# EAGLE board PCB (EAGLE 9.7.0)
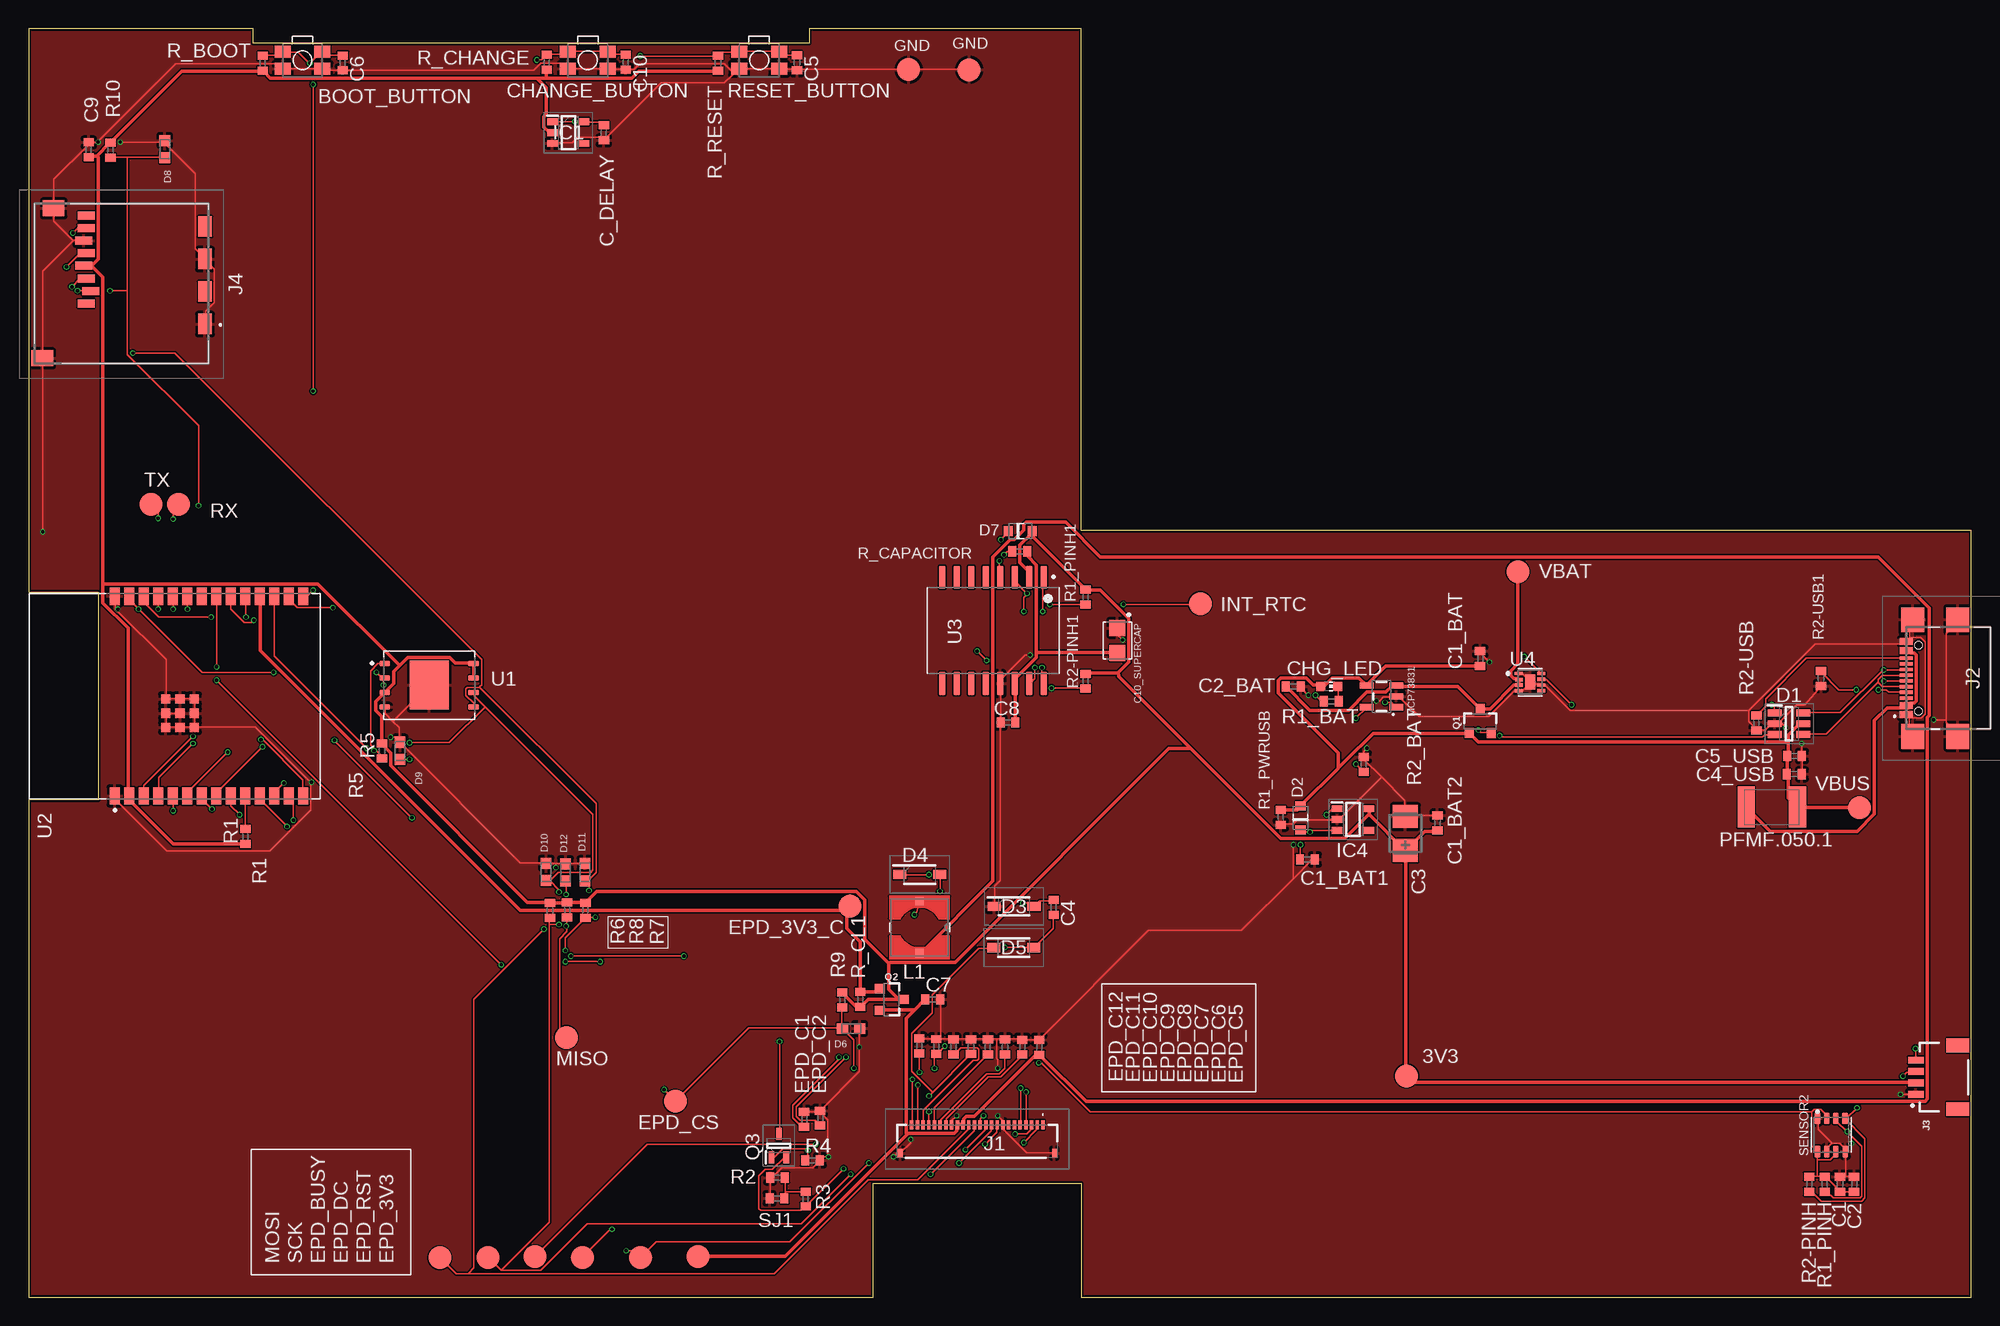
[diagram p0: board, top side]
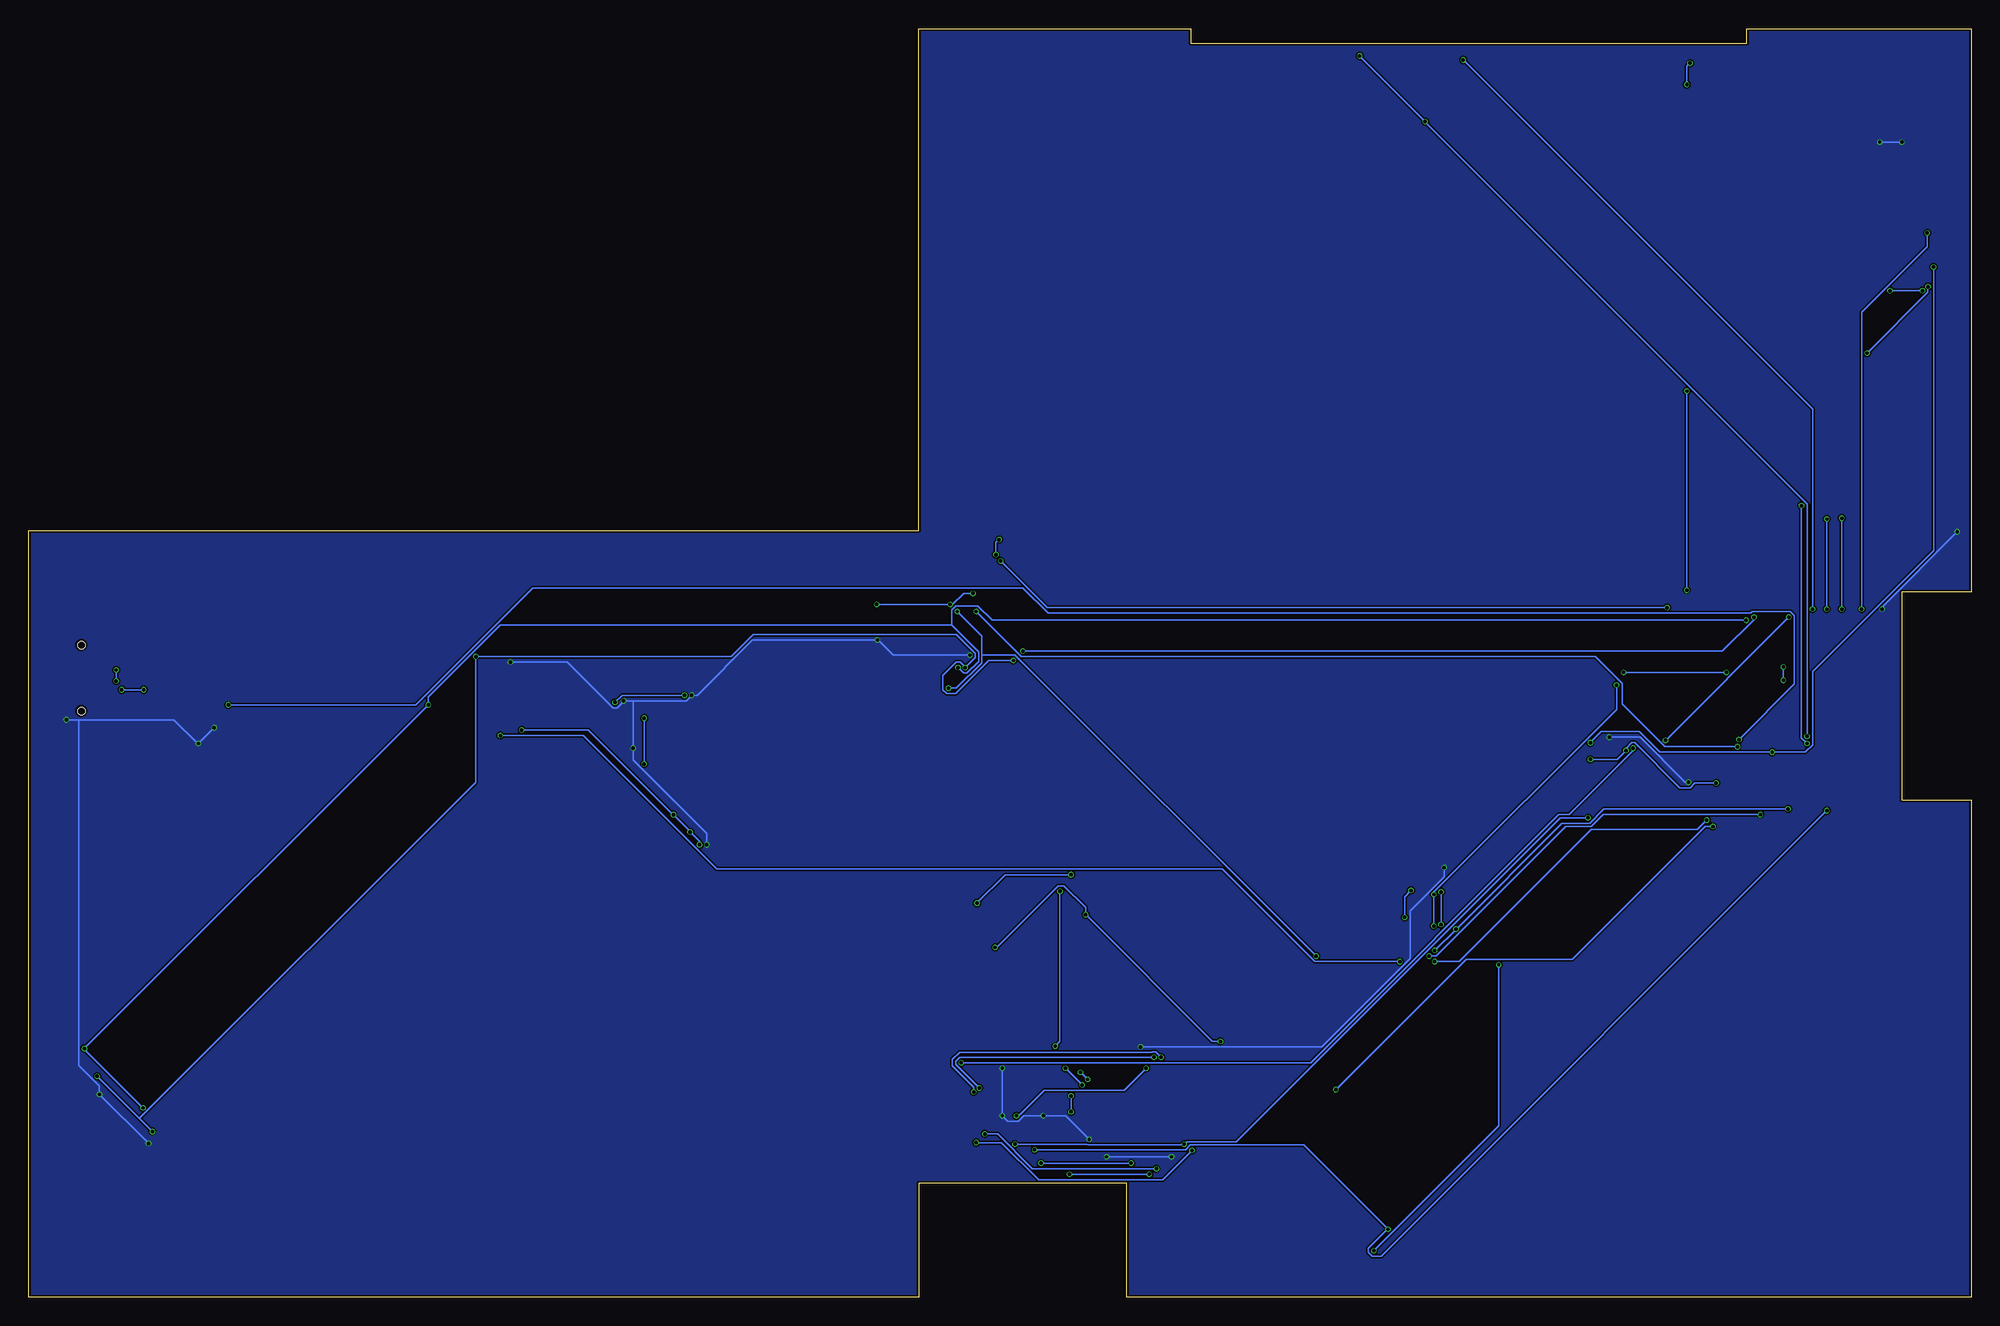
[diagram p1: board, bottom side, seen from below]

Size 170.2 x 111.2 mm. Coordinates in mm from the lower left corner, seen from the top.
Outline: 0,0 74,0 74,10 92.2,10 92.2,0 170.2,0 170.2,67.2 92.2,67.2 92.2,111.2 68.4,111.2 68.4,109.9 19.7,109.9 19.7,111.2 0,111.2 0,61.8 6.1,61.8 6.1,43.6 0,43.6 0,0
Copper layers (1*16): Top 0.035mm / dielectric 1.6mm / Bottom 0.035mm
Design rules "jlcpcb-2layers.dru": minimum track width 5mil, minimum drill 0.3mm, track to track 5mil, track to pad 5mil, pad to pad 5mil, via to via 5mil, smd to smd 5mil, copper to edge 0.2mm, drill to drill 6mil, minimum pad ring 10mil, minimum via ring 3mil, stop-mask expansion 4mil, vias tented up to drill 0mil, thermal gap 10mil
Net classes: 0 default: width 0.15 mm; 1 POWER: width 0.3 mm

## Footprints (pad centres in the part's own frame; a part is rotated, then mirrored left to right if it is on the bottom)
MYBUTTON = smd 1.4 x 1.05: 1 1.75,0.75; 2 -1.75,0.75; 3 -1.75,-0.75; 4 1.75,-0.75
EAGLE-LTSPICE_C0402 = smd 0.7 x 0.9: 1 -0.65,0; 2 0.65,0
RCL_CT3528 = smd 2 x 2.2: + -1.5,0; - 1.5,0
CAPCP3225X100N = smd 1.4 x 1.4: 1 -1.1,0; 2 1.1,0
ADAFRUIT_CHIP-LED0603 = smd 0.8 x 0.8: A 0,-0.75; C 0,0.75
SOT95P280X145-6N = smd 1.2 x 0.6: 1 -1.25,0.95; 2 -1.25,0; 3 -1.25,-0.95; 4 1.25,-0.95; 5 1.25,0; 6 1.25,0.95
ESP32_WROVER_AVX---SD0805S020S1R0_AVX_SD0805S020S1R0_0 = smd 0.8 x 0.9: 1 -1.05,0; 2 1.05,0
SOD3716X135N = smd 1.15 x 0.8: 1 -1.75,0; 2 1.75,0
DIOC1608X36N = smd 0.97 x 0.94: 1 -0.75,0; 2 0.75,0
SOT95P280X125-5N = smd 0.9 x 0.6: 1 -1.4,0.95; 2 -1.4,0; 3 -1.4,-0.95; 4 1.4,-0.95; 5 1.4,0.95
SOT95P280X120-5N = smd 0.9 x 0.6: 1 -1.4,0.95; 2 -1.4,0; 3 -1.4,-0.95; 4 1.4,-0.95; 5 1.4,0.95
FH34SRJ24S05SH99 = smd 0.3 x 0.8: 1 5.75,1.45; 2 5.25,1.45; 3 4.75,1.45; 4 4.25,1.45; 5 3.75,1.45; 6 3.25,1.45; 7 2.75,1.45; 8 2.25,1.45; 9 1.75,1.45; 10 1.25,1.45; 11 0.75,1.45; 12 0.25,1.45; 13 -0.25,1.45; 14 -0.75,1.45; 15 -1.25,1.45; 16 -1.75,1.45; 17 -2.25,1.45; 18 -2.75,1.45; 19 -3.25,1.45; 20 -3.75,1.45; 21 -4.25,1.45; 22 -4.75,1.45; 23 -5.25,1.45; 24 -5.75,1.45 | smd 0.4 x 0.8: MP1 6.75,-1.05; MP2 -6.75,-1.05
SAMACSYS_PARTS_USB4110GFA = smd 0.3 x 1.15: A1 -3.35,3.678; A4 -2.55,3.678; A5 -1.25,3.678; A6 -0.25,3.678; A7 0.25,3.678; A8 1.25,3.678; A9 2.55,3.678; A12 3.35,3.678; B1 3.05,3.678; B4 2.25,3.678; B5 1.75,3.678; B6 0.75,3.678; B7 -0.75,3.678; B8 -1.75,3.678; B9 -2.25,3.678; B12 -3.05,3.678 | smd 2.18 x 2: MP1 -5.11,-0.827; MP2 5.11,-0.827; MP3 -5.11,3.103; MP4 5.11,3.103 | hole 0.65: -2.89,2.603; 2.89,2.603
JST04_1MM_RA = smd 0.6 x 1.35: 1 -1.5,0; 2 -0.5,0; 3 0.5,0; 4 1.5,0 | smd 1.2 x 2: NC1 2.8,-3.675; NC2 -2.8,-3.675
112ATAARR03ATTEND = smd 1.8 x 1.2: G1 10.6,10.4; G2 4.9,10.4; S1 7.75,10.4; S2 2.05,10.4 | smd 1.4 x 1.9: G3 13.6,-3.85; G4 0.45,-2.85 | smd 0.7 x 1.5: P1 8.8,0; P2 7.7,0.4; P3 6.6,0; P4 5.5,-0.2; P5 4.4,0; P6 3.3,-0.2; P7 2.2,0; P8 1.1,0
IND_4828-WE-TPC_WRE = smd 0.762 x 0.762: 1 -2.286,0; 2 2.286,0
ESP32_WROVER_SPARKFUN-IC-POWER_SOT23-5 = smd 0.55 x 1.2: 1 -0.95,-1.3; 2 0,-1.3; 3 0.95,-1.3; 4 0.95,1.3; 5 -0.95,1.3
ESP32C6_VARISTOR_CT/CN1812 = smd 1.5 x 3.6: 1 -2.25,0; 2 2.25,0
ESP32_WROVER_SPARKFUN-DISCRETESEMI_SOT23-3 = smd 0.8 x 0.9: 1 -0.95,-1; 2 0.95,-1; 3 0,1.1
SOT65P210X110-3N = smd 1.05 x 0.5: 1 -1.05,0.65; 2 -1.05,-0.65; 3 1.05,0
ESP32_WROVER_EAGLE-LTSPICE_R0402 = smd 0.7 x 0.9: 1 -0.65,0; 2 0.65,0
ESP32_WROVER_BME680_PSON80P300X300X100-8N = smd 1.016 x 0.5: 1 1.458,1.2; 2 1.458,0.4; 3 1.458,-0.4; 4 1.458,-1.2; 5 -1.458,-1.22; 6 -1.458,-0.4; 7 -1.458,0.4; 8 -1.458,1.2
TP20R = smd 2 x 2: TP 0,0
SON127P600X800X80-9N = smd 0.94 x 0.44: 1 -3.895,1.905; 2 -3.895,0.635; 3 -3.895,-0.635; 4 -3.895,-1.905; 5 3.895,-1.905; 6 3.895,-0.635; 7 3.895,0.635; 8 3.895,1.905 | smd 3.4 x 4.3: 9 0,0
XCVR_ESP32-C6-WROOM-1-N8 = smd 1.5 x 0.9: 1 -8.75,5.26; 2 -8.75,3.99; 3 -8.75,2.72; 4 -8.75,1.45; 5 -8.75,0.18; 6 -8.75,-1.09; 7 -8.75,-2.36; 8 -8.75,-3.63; 9 -8.75,-4.9; 10 -8.75,-6.17; 11 -8.75,-7.44; 12 -8.75,-8.71; 13 -8.75,-9.98; 14 -8.75,-11.25; 15 8.75,-11.25; 16 8.75,-9.98; 17 8.75,-8.71; 18 8.75,-7.44; 19 8.75,-6.17; 20 8.75,-4.9; 21 8.75,-3.63; 22 8.75,-2.36; 23 8.75,-1.09; 24 8.75,0.18; 25 8.75,1.45; 26 8.75,2.72; 27 8.75,3.99; 28 8.75,5.26 | smd 0.8 x 0.8: 29_1 -2.755,0.79; 29_2 -1.505,0.79; 29_3 -0.255,0.79; 29_4 -2.755,-0.46; 29_5 -1.505,-0.46; 29_6 -0.255,-0.46; 29_7 -2.755,-1.71; 29_8 -1.505,-1.71; 29_9 -0.255,-1.71
SOIC127P1032X265-16N = smd 2.05 x 0.59: 1 -4.655,4.445; 2 -4.655,3.175; 3 -4.655,1.905; 4 -4.655,0.635; 5 -4.655,-0.635; 6 -4.655,-1.905; 7 -4.655,-3.175; 8 -4.655,-4.445; 9 4.655,-4.445; 10 4.655,-3.175; 11 4.655,-1.905; 12 4.655,-0.635; 13 4.655,0.635; 14 4.655,1.905; 15 4.655,3.175; 16 4.655,4.445
SON50P200X200X80-9N = smd 0.76 x 0.27: 1 -0.985,0.75; 4 -0.985,-0.75; 5 0.985,-0.75; 6 0.985,-0.25; 7 0.985,0.25; 8 0.985,0.75 | smd 0.76 x 0.33: 2 -0.985,0.203 | smd 0.76 x 0.356: 3 -0.985,-0.25 | smd 0.9 x 1.3: 9 0,0

## Placement (x,y rotation side)
BOOT_BUTTON  [MYBUTTON]  24,108.42 180 top
C1  100nF  [EAGLE-LTSPICE_C0402]  158.68,9.93 90 top
C1_BAT  4.7uF  [EAGLE-LTSPICE_C0402]  127.16,55.99 90 top
C1_BAT1  4.7uF  [EAGLE-LTSPICE_C0402]  112.03,38.38 0 top
C1_BAT2  4.7uF  [EAGLE-LTSPICE_C0402]  123.42,41.57 90 top
C2  100nF  [EAGLE-LTSPICE_C0402]  159.92,9.93 90 top
C2_BAT  4.7uF  [EAGLE-LTSPICE_C0402]  110.8,53.54 0 top
C3  100uF TANT  [RCL_CT3528]  120.61,40.66 90 top
C4  4.7uF/25V  [EAGLE-LTSPICE_C0402]  89.8,34.18 270 top
C4_USB  100nF  [EAGLE-LTSPICE_C0402]  154.69,45.86 0 top
C5  1uF  [EAGLE-LTSPICE_C0402]  67.32,108.21 270 top
C5_USB  4.7uF  [EAGLE-LTSPICE_C0402]  154.7,47.46 0 top
C6  100nF  [EAGLE-LTSPICE_C0402]  27.52,108.18 270 top
C7  10uF  [EAGLE-LTSPICE_C0402]  79.21,26.12 0 top
C8  100nF  [EAGLE-LTSPICE_C0402]  85.8,50.38 180 top
C9  100nF  [EAGLE-LTSPICE_C0402]  5.28,100.58 90 top
C10  100nF  [EAGLE-LTSPICE_C0402]  52.32,108.24 270 top
C10_SUPERCAP  CPH3225A  [CAPCP3225X100N]  95.38,57.57 270 top
C_DELAY  100nF  [EAGLE-LTSPICE_C0402]  50.4,102.06 270 top
CHANGE_BUTTON  [MYBUTTON]  49,108.42 180 top
CHG_LED  [ADAFRUIT_CHIP-LED0603]  113.95,53.55 270 top
D1  USBLC6-2SC6Y  [SOT95P280X145-6N]  154.22,50.28 0 top
D2  SD0805S020S1R0  [ESP32_WROVER_AVX---SD0805S020S1R0_AVX_SD0805S020S1R0_0]  111.43,42.01 90 top
D3  MBR0530  [SOD3716X135N]  86.33,34.26 0 top
D4  MBR0530  [SOD3716X135N]  78.07,37.06 0 top
D5  MBR0530  [SOD3716X135N]  86.31,30.66 0 top
D6  PGB1010603MR  [DIOC1608X36N]  72.05,23.56 0 top
D7  SD0805S020S1R0  [ESP32_WROVER_AVX---SD0805S020S1R0_AVX_SD0805S020S1R0_0]  86.86,67.17 0 top
D8  PGB1010603MR  [DIOC1608X36N]  11.94,100.63 90 top
D9  PGB1010603MR  [DIOC1608X36N]  32.54,47.91 90 top
D10  PGB1010603MR  [DIOC1608X36N]  45.34,37.29 90 top
D11  PGB1010603MR  [DIOC1608X36N]  48.74,37.27 90 top
D12  PGB1010603MR  [DIOC1608X36N]  47.04,37.25 90 top
EPD_C1  1uF/50V  [EAGLE-LTSPICE_C0402]  67.94,15.61 90 top
EPD_C2  1uF/50V  [EAGLE-LTSPICE_C0402]  69.34,15.72 90 top
EPD_C5  0.1uF/50V  [EAGLE-LTSPICE_C0402]  88.54,21.93 90 top
EPD_C6  1uF/50V  [EAGLE-LTSPICE_C0402]  87.04,21.94 90 top
EPD_C7  1uF/50V  [EAGLE-LTSPICE_C0402]  85.54,21.95 90 top
EPD_C8  1uF/50V  [EAGLE-LTSPICE_C0402]  84.04,21.96 90 top
EPD_C9  1uF/50V  [EAGLE-LTSPICE_C0402]  82.56,21.98 90 top
EPD_C10  1uF/50V  [EAGLE-LTSPICE_C0402]  81.03,21.96 90 top
EPD_C11  1uF/50V  [EAGLE-LTSPICE_C0402]  79.52,21.99 90 top
EPD_C12  1uF/50V  [EAGLE-LTSPICE_C0402]  78.02,22.05 90 top
IC1  BD5229G-TR  [SOT95P280X125-5N]  47.29,102.08 0 top
IC4  XC6220A331MR-G  [SOT95P280X120-5N]  116.03,41.88 0 top
J1  FH34SRJ-24S-0.5SH_99_  [FH34SRJ24S05SH99]  83.11,13.68 0 top
J2  [SAMACSYS_PARTS_USB4110GFA]  168.17,54.28 90 top
J3  QWIIC_RIGHT_ANGLE  [JST04_1MM_RA]  165.32,19.3 90 top
J4  112A-TAAR-R03_ATTEND  [112ATAARR03ATTEND]  5.05,95.9 270 top
L1  68uH  [IND_4828-WE-TPC_WRE]  78.05,32.43 270 top
MCP73831  [ESP32_WROVER_SPARKFUN-IC-POWER_SOT23-5]  118.52,52.67 90 top
PFMF.050.1  [ESP32C6_VARISTOR_CT/CN1812]  152.71,42.98 0 top
Q1  20V/4.2A/52mΩ/1.4W  [ESP32_WROVER_SPARKFUN-DISCRETESEMI_SOT23-3]  127.17,50.46 0 top
Q2  20V/4.2A/52mΩ/1.4W  [ESP32_WROVER_SPARKFUN-DISCRETESEMI_SOT23-3]  75.56,26.11 270 top
Q3  SI1308EDL-T1-GE3  [SOT65P210X110-3N]  65.73,13.31 90 top
R1  10k  [ESP32_WROVER_EAGLE-LTSPICE_R0402]  19,40.39 90 top
R1_BAT  200  [ESP32_WROVER_EAGLE-LTSPICE_R0402]  114.11,52.24 0 top
R1_PINH  10K  [ESP32_WROVER_EAGLE-LTSPICE_R0402]  157.35,9.93 90 top
R1_PINH1  10K  [ESP32_WROVER_EAGLE-LTSPICE_R0402]  92.6,61.38 90 top
R1_PWRUSB  100K  [ESP32_WROVER_EAGLE-LTSPICE_R0402]  109.7,42.07 90 top
R2  2.2  [ESP32_WROVER_EAGLE-LTSPICE_R0402]  65.61,10.5 0 top
R2-PINH  10K  [ESP32_WROVER_EAGLE-LTSPICE_R0402]  155.99,9.93 90 top
R2-PINH1  10K  [ESP32_WROVER_EAGLE-LTSPICE_R0402]  92.6,54 90 top
R2-USB  5k1  [ESP32_WROVER_EAGLE-LTSPICE_R0402]  151.36,50.33 90 top
R2-USB1  5k1  [ESP32_WROVER_EAGLE-LTSPICE_R0402]  157.02,54.25 90 top
R2_BAT  2k  [ESP32_WROVER_EAGLE-LTSPICE_R0402]  116.96,46.72 90 top
R3  0.47  [ESP32_WROVER_EAGLE-LTSPICE_R0402]  68.08,8.63 90 top
R4  10K  [ESP32_WROVER_EAGLE-LTSPICE_R0402]  68.67,12.02 0 top
R5  10K  [ESP32_WROVER_EAGLE-LTSPICE_R0402]  30.97,47.89 90 top
R6  10K  [ESP32_WROVER_EAGLE-LTSPICE_R0402]  45.68,33.91 90 top
R7  10K  [ESP32_WROVER_EAGLE-LTSPICE_R0402]  48.78,33.93 90 top
R8  10K  [ESP32_WROVER_EAGLE-LTSPICE_R0402]  47.18,33.95 90 top
R9  10K  [ESP32_WROVER_EAGLE-LTSPICE_R0402]  71.28,26.07 90 top
R10  10K  [ESP32_WROVER_EAGLE-LTSPICE_R0402]  7.18,100.55 90 top
R_BOOT  10K  [ESP32_WROVER_EAGLE-LTSPICE_R0402]  20.52,108.16 90 top
R_CAPACITOR  15  [ESP32_WROVER_EAGLE-LTSPICE_R0402]  86.84,65.38 0 top
R_CHANGE  10K  [ESP32_WROVER_EAGLE-LTSPICE_R0402]  45.4,108.24 90 top
R_CL1  10K  [ESP32_WROVER_EAGLE-LTSPICE_R0402]  72.86,26.11 90 top
R_RESET  10K  [ESP32_WROVER_EAGLE-LTSPICE_R0402]  60.4,108.16 90 top
RESET_BUTTON  [MYBUTTON]  64,108.42 180 top
SENSOR2  BME688  [ESP32_WROVER_BME680_PSON80P300X300X100-8N]  157.92,14.25 90 top
SJ1  [ESP32_WROVER_EAGLE-LTSPICE_R0402]  65.56,8.68 0 top
TP1  TPTP20R  [TP20R]  10.72,69.5 0 top
TP2  TPTP20R  [TP20R]  13.15,69.5 0 top
TP3  TPTP20R  [TP20R]  130.47,63.6 0 top
TP4  TPTP20R  [TP20R]  77.09,107.6 0 top
TP5  TPTP20R  [TP20R]  82.39,107.58 0 top
TP6  TPTP20R  [TP20R]  47.11,22.78 0 top
TP7  TPTP20R  [TP20R]  36.03,3.48 0 top
TP8  TPTP20R  [TP20R]  40.25,3.48 0 top
TP9  TPTP20R  [TP20R]  44.37,3.58 0 top
TP10  TPTP20R  [TP20R]  56.66,17.2 0 top
TP11  TPTP20R  [TP20R]  48.51,3.5 0 top
TP12  TPTP20R  [TP20R]  53.61,3.5 0 top
TP13  TPTP20R  [TP20R]  71.96,34.3 0 top
TP14  TPTP20R  [TP20R]  160.41,42.9 0 top
TP15  TPTP20R  [TP20R]  102.66,60.8 0 top
TP16  TPTP20R  [TP20R]  120.71,19.4 0 top
TP17  TPTP20R  [TP20R]  58.66,3.6 0 top
U1  W25Q512JVEIQ  [SON127P600X800X80-9N]  35.1,53.66 0 top
U2  ESP32-C6-WROOM-1-N8  [XCVR_ESP32-C6-WROOM-1-N8]  12.81,52.7 90 top
U3  DS3231SN#  [SOIC127P1032X265-16N]  84.5,58.45 270 top
U4  MAX17048G+T10  [SON50P200X200X80-9N]  131.54,53.93 0 top

## Library data of the parts
BOOT_BUTTON CHANGE_BUTTON CHG_LED PFMF.050.1 RESET_BUTTON SJ1 TP1-TP17 = DeskAssistant v19 v1
C1 C1_BAT C1_BAT1 C1_BAT2 C2 C2_BAT C4 C4_USB C5 C5_USB C6-C10 C_DELAY EPD_C1 EPD_C2 EPD_C5-EPD_C12 = DeskAssistant v19 v1; SPICEMODEL: NONE; SPICEPREFIX: C
C3 = DeskAssistant v19 v1; SPICEPREFIX: C
C10_SUPERCAP = DeskAssistant v19 v1; AVAILABILITY: Not in stock; CHECK_PRICES: https://www.snapeda.com/parts/CPH3225A/Seiko+Instruments/view-part/?ref=eda; DESCRIPTION: 11 mF (EDLC) Supercapacitor 3.3 V 1210 (3225 Metric) - -; MF: Seiko Instruments; MP: CPH3225A; PACKAGE: 1210 Seiko; PRICE: None; PURCHASE-URL: https://www.snapeda.com/api/url_track_click_mouser/?unipart_id=562593&manufacturer=Seiko Instruments&part_name=CPH3225A&search_term=None; SNAPEDA_LINK: https://www.snapeda.com/parts/CPH3225A/Seiko+Instruments/view-part/?ref=snap
D1 = DeskAssistant v19 v1; AVAILABILITY: In Stock; CHECK_PRICES: https://www.snapeda.com/parts/USBLC6-2SC6Y/STMicroelectronics/view-part/?ref=eda; DESCRIPTION: 17V Clamp 5A (8/20µs) Ipp Tvs Diode Surface Mount SOT-23-6; MF: STMicroelectronics; MP: USBLC6-2SC6Y; PACKAGE: SOT-23-6 STMicroelectronics; PRICE: None; SNAPEDA_LINK: https://www.snapeda.com/parts/USBLC6-2SC6Y/STMicroelectronics/view-part/?ref=snap
D2 D7 = DeskAssistant v19 v1; CENTROID_NOT_SPECIFIED: No; DATASHEET: http://datasheets.avx.com/schottky.pdf; DIGIKEY_DESCRIPTION: DIODE SCHOTTKY 20V 1A 0805; DIGIKEY_PART_NUMBER: 478-7800-1-ND; LEAD_FREE: yes; MF: AVX; MOUSER_PART_NUMBER: 581-SD0805S020S1R0; PACKAGE: 0805 (2012 metric); PREFIX: D; ROHS: yes; TEMPERATURE_RANGE_HIGH: +125°C; TEMPERATURE_RANGE_LOW: -55°C
D3-D5 = DeskAssistant v19 v1; AVAILABILITY: In Stock; CHECK_PRICES: https://www.snapeda.com/parts/MBR0530/Onsemi/view-part/?ref=eda; DESCRIPTION: Diode Schottky 30 V 500mA Surface Mount SOD-123; MF: ON Semiconductor; MP: MBR0530; PACKAGE: SOD-123-2 ON Semiconductor; PRICE: None; PURCHASE-URL: https://www.snapeda.com/api/url_track_click_mouser/?unipart_id=179458&manufacturer=ON Semiconductor&part_name=MBR0530&search_term=None; SNAPEDA_LINK: https://www.snapeda.com/parts/MBR0530/Onsemi/view-part/?ref=snap
D6 D8-D12 = DeskAssistant v19 v1; AVAILABILITY: In Stock; CHECK_PRICES: https://www.snapeda.com/parts/PGB1010603MR/Littelfuse/view-part/?ref=eda; DESCRIPTION: 150V (Typ) Clamp - Ipp Tvs Diode Surface Mount 0603 (1608 Metric); MF: Littelfuse Inc.; MP: PGB1010603MR; PACKAGE: 0603 Littelfuse Inc.; PRICE: None; PURCHASE-URL: https://www.snapeda.com/api/url_track_click_mouser/?unipart_id=5659453&manufacturer=Littelfuse Inc.&part_name=PGB1010603MR&search_term=None; SNAPEDA_LINK: https://www.snapeda.com/parts/PGB1010603MR/Littelfuse/view-part/?ref=snap
IC1 = DeskAssistant v19 v1; DESCRIPTION: Voltage Detector with Adjustable Delay Time: CMOS processes are utilized to develop high precision, low current consumption CMOS reset ICs that allow arbitrary setting of the delay time. The extensive lineup includes both Nch Open Drain and CMOS output types in a wide range of detection voltages (from 2.3V to 6.0V, in 0.1V steps), enabling selection of the ideal solution based on customer requirements. In addition, the entire series is of course both lead-free and RoHS-compliant.; HEIGHT: 1.25mm; MANUFACTURER_NAME: ROHM Semiconductor; MANUFACTURER_PART_NUMBER: BD5229G-TR; MOUSER_PART_NUMBER: 755-BD5229G-TR; MOUSER_PRICE-STOCK: https://www.mouser.co.uk/ProductDetail/ROHM-Semiconductor/BD5229G-TR?qs=4kLU8WoGk0vvnhrrYwdszw%3D%3D
IC4 = DeskAssistant v19 v1; DESCRIPTION: LDO Voltage Regulators; HEIGHT: 1.2mm; MANUFACTURER_NAME: Torex; MANUFACTURER_PART_NUMBER: XC6220A331MR-G; MOUSER_PART_NUMBER: 865-XC6220A331MR-G; MOUSER_PRICE-STOCK: https://www.mouser.co.uk/ProductDetail/Torex-Semiconductor/XC6220A331MR-G?qs=AsjdqWjXhJ8ZSWznL1J0gg%3D%3D
J1 = DeskAssistant v19 v1; DESCRIPTION: 24 Position FFC, FPC Connector Contacts, Top and Bottom 0.020" (0.50mm) Surface Mount, Right Angle; HEIGHT: 1.1mm; MANUFACTURER_NAME: Hirose; MANUFACTURER_PART_NUMBER: FH34SRJ-24S-0.5SH(99); MOUSER_PART_NUMBER: 798-FH34SRJ24S05SH99; MOUSER_PRICE-STOCK: https://www.mouser.co.uk/ProductDetail/Hirose-Connector/FH34SRJ-24S-0.5SH99?qs=vcbW%252B4%252BSTIpKBl5ap9J8Fw%3D%3D
J2 = DeskAssistant v19 v1; DESCRIPTION: CONN USB 2.0 TYPE-C R/A SMT; HEIGHT: 3.26mm; MANUFACTURER_NAME: GCT (GLOBAL CONNECTOR TECHNOLOGY); MANUFACTURER_PART_NUMBER: USB4110-GF-A; MOUSER_PART_NUMBER: 640-USB4110-GF-A; MOUSER_PRICE-STOCK: https://www.mouser.co.uk/ProductDetail/GCT/USB4110-GF-A?qs=KUoIvG%2F9IlYiZvIXQjyJeA%3D%3D
J3 = DeskAssistant v19 v1; PROD_ID: CONN-13694
J4 = DeskAssistant v19 v1; DESCRIPTION: Micro SD Card Socket, Push-Push Type, Top Mount, SMT, H=1.83mm, 10u; HEIGHT: 1.9mm; MANUFACTURER_NAME: ATTEND; MANUFACTURER_PART_NUMBER: 112A-TAAR-R03 ATTEND
L1 = DeskAssistant v19 v1; COPYRIGHT: Copyright (C) 2024 Ultra Librarian. All rights reserved.; MANUFACTURER_PART_NUMBER: 744043680; MFR_NAME: Wurth Electronics
MCP73831 = DeskAssistant v19 v1; PROD_ID: IC-09995
Q1 Q2 = DeskAssistant v19 v1; PROD_ID: TRAN-14388
Q3 = DeskAssistant v19 v1; AVAILABILITY: In Stock; CHECK_PRICES: https://www.snapeda.com/parts/SI1308EDL-T1-GE3/Vishay+Siliconix/view-part/?ref=eda; DESCRIPTION: Si1308EDL-T1-GE3 N-channel MOSFET Transistor, 1.5 A, 30 V, 3-Pin SC-70 | Siliconix / Vishay SI1308EDL-T1-GE3; MF: Vishay Siliconix; MP: SI1308EDL-T1-GE3; PACKAGE: SOT-323 Vishay Semiconductor; PRICE: None; PURCHASE-URL: https://www.snapeda.com/api/url_track_click_mouser/?unipart_id=274603&manufacturer=Vishay Siliconix&part_name=SI1308EDL-T1-GE3&search_term=None; SNAPEDA_LINK: https://www.snapeda.com/parts/SI1308EDL-T1-GE3/Vishay+Siliconix/view-part/?ref=snap
R1 R1_BAT R1_PINH R1_PINH1 R1_PWRUSB R2 R2-PINH R2-PINH1 R2-USB R2-USB1 R2_BAT R3-R10 R_BOOT R_CAPACITOR R_CHANGE R_CL1 R_RESET = DeskAssistant v19 v1; SPICEMODEL: NONE; SPICEPREFIX: R
SENSOR2 = DeskAssistant v19 v1; AVAILABILITY: Unavailable; DESCRIPTION: Integrated Environmental Unit; MF: Bosch Sensortec; MP: BME680; PACKAGE: LGA-8 Bosch Tools; PRICE: None
U1 = DeskAssistant v19 v1; AVAILABILITY: In Stock; CHECK_PRICES: https://www.snapeda.com/parts/W25Q512JVEIQ/Winbond+Electronics/view-part/?ref=eda; DESCRIPTION: FLASH - NOR Memory IC 512Mb (64M x 8) SPI - Quad I/O 133 MHz 8-WSON (8x6); MF: Winbond Electronics; MP: W25Q512JVEIQ; PACKAGE: Package; PRICE: None; SNAPEDA_LINK: https://www.snapeda.com/parts/W25Q512JVEIQ/Winbond+Electronics/view-part/?ref=snap
U2 = DeskAssistant v19 v1; AVAILABILITY: In Stock; CHECK_PRICES: https://www.snapeda.com/parts/ESP32-C6-WROOM-1-N8/Espressif+Systems/view-part/?ref=eda; DESCRIPTION: Multiprotocol Modules ESP32-C6 module, Wi-Fi 6 in 2.4 GHz band, Bluetooth 5, Zigbee 3.0 and Thread. ESP34-WROOM Compatible - ENGINEERING SAMPLE; MF: Espressif Systems; MP: ESP32-C6-WROOM-1-N8; PACKAGE: None; PRICE: None; SNAPEDA_LINK: https://www.snapeda.com/parts/ESP32-C6-WROOM-1-N8/Espressif+Systems/view-part/?ref=snap
U3 = DeskAssistant v19 v1; AVAILABILITY: In Stock; CHECK_PRICES: https://www.snapeda.com/parts/DS3231SN%23/Analog+Devices/view-part/?ref=eda; DESCRIPTION: Extremely Accurate I²C-Integrated RTC/TCXO/Crystal; MF: Analog Devices; MP: DS3231SN#; PACKAGE: SOIC-16 Maxim; PRICE: None; PURCHASE-URL: https://www.snapeda.com/api/url_track_click_mouser/?unipart_id=99048&manufacturer=Analog Devices&part_name=DS3231SN#&search_term=None; SNAPEDA_LINK: https://www.snapeda.com/parts/DS3231SN%23/Analog+Devices/view-part/?ref=snap
U4 = DeskAssistant v19 v1; AVAILABILITY: In Stock; CHECK_PRICES: https://www.snapeda.com/parts/MAX17048G+T10/Analog+Devices/view-part/?ref=eda; DESCRIPTION: 3µA 1-Cell/2-Cell Fuel Gauge with ModelGauge; MF: Analog Devices; MP: MAX17048G+T10; PACKAGE: TDFN-8 Maxim; PRICE: None; PURCHASE-URL: https://www.snapeda.com/api/url_track_click_mouser/?unipart_id=329239&manufacturer=Analog Devices&part_name=MAX17048G+T10&search_term=None; SNAPEDA_LINK: https://www.snapeda.com/parts/MAX17048G+T10/Analog+Devices/view-part/?ref=snap

## Nets
3V3 [POWER]: C1_BAT2.1 C3.+ C9.1 D7.2 IC1.2 IC4.5 J3.2 J4.P4 Q2.3 R1.1 R1_PINH1.2 R2-PINH1.2 R5.2 R6.2 R7.2 R8.2 R9.2 R10.2 R_BOOT.1 R_CHANGE.1 R_CL1.1 R_RESET.1 TP16.TP U1.3 U1.7 U1.8 U2.2 U3.2
32KHZ: R2-PINH1.1 U2.9 U3.1
DN: D1.4 J2.A7 J2.B7
DP: D1.6 J2.A6 J2.B6
EPD_3V3 [POWER]: C7.1 EPD_C5.1 J1.15 J1.16 L1.2 Q2.2 TP17.TP
EPD_3V3_C [POWER]: Q2.1 R_CL1.2 TP13.TP U2.18
EPD_BUSY: J1.9 TP9.TP U2.26
EPD_CS: D6.1 J1.12 R9.1 TP10.TP U2.11
EPD_DC: J1.11 TP11.TP U2.5
EPD_RST: J1.10 TP12.TP U2.21
FLASH_CS: D9.1 R5.1 U1.1 U2.12
GDR: J1.2 Q3.1 R4.1
GND: BOOT_BUTTON.1 BOOT_BUTTON.2 C1.2 C1_BAT1.2 C1_BAT2.2 C1_BAT.2 C2.2 C2_BAT.2 C3.- C4_USB.2 C5.2 C5_USB.2 C6.2 C7.2 C8.2 C9.2 C10.2 C10_SUPERCAP.1 C_DELAY.2 CHANGE_BUTTON.1 CHANGE_BUTTON.2 D1.2 D3.1 D6.2 D8.2 D9.2 D10.2 D11.2 D12.2 EPD_C1.2 EPD_C2.2 EPD_C5.2 EPD_C6.2 EPD_C7.2 EPD_C8.2 EPD_C9.2 EPD_C10.2 EPD_C11.2 EPD_C12.2 IC1.3 IC4.2 J1.8 J1.17 J1.MP1 J1.MP2 J2.A1 J2.A12 J2.B1 J2.B12 J2.MP1 J2.MP2 J2.MP3 J2.MP4 J3.1 J4.G1 J4.G2 J4.G3 J4.G4 J4.P6 MCP73831.2 R1_PWRUSB.1 R2-USB1.1 R2-USB.1 R2.1 R2_BAT.2 R4.2 RESET_BUTTON.1 RESET_BUTTON.2 SENSOR2.1 SENSOR2.5 SENSOR2.7 SJ1.1 TP4.TP TP5.TP U1.4 U1.9 U2.1 U2.28 U2.29_1 U2.29_2 U2.29_3 U2.29_4 U2.29_5 U2.29_6 U2.29_7 U2.29_8 U2.29_9 U3.13 U4.1 U4.4 U4.6 U4.9
GPIO8: R1.2 U2.10
I2C_PW: C1.1 C2.1 R1_PINH.2 R2-PINH.2 SENSOR2.2 SENSOR2.6 SENSOR2.8 U2.17
INT_RTC: R1_PINH1.1 TP15.TP U2.8 U3.3
IO/BOOT: BOOT_BUTTON.3 BOOT_BUTTON.4 C6.1 R_BOOT.2 U2.15
IO/CHANGE: C10.1 CHANGE_BUTTON.3 CHANGE_BUTTON.4 R_CHANGE.2 U2.23
MISO: D12.1 J4.P7 R8.1 TP6.TP U1.2 U2.27
MOSI: D11.1 J1.14 J4.P3 R7.1 TP7.TP U1.5 U2.7
N$1: J2.A5 R2-USB1.2
N$2: J2.B5 R2-USB.2
N$4: EPD_C12.1 J1.24
N$5: C1_BAT1.1 D2.1 IC4.1 IC4.3 Q1.2
N$6: CHG_LED.C R1_BAT.2
N$7: C4.1 D3.2 D4.1
N$8: MCP73831.1 R1_BAT.1
N$9: MCP73831.5 R2_BAT.1
N$10: EPD_C2.1 J1.5
N$11: EPD_C10.1 J1.22
N$12: EPD_C1.1 J1.4
N$13: EPD_C8.1 J1.20
N$14: EPD_C7.1 J1.19
N$15: EPD_C6.1 J1.18
N$16: C_DELAY.1 IC1.5
N$17: D7.1 R_CAPACITOR.1
PREVGH: D5.1 EPD_C9.1 J1.21
PREVGL: D4.2 EPD_C11.1 J1.23
RESE: J1.3 Q3.2 R3.1
RESE': R2.2 R3.2 SJ1.2
RESET: C5.1 IC1.1 R_RESET.2 RESET_BUTTON.3 RESET_BUTTON.4 U2.3
RTC_RST: U2.16 U3.4
RX: TP2.TP U2.24
SCK: D10.1 J1.13 J4.P5 R6.1 TP8.TP U1.6 U2.6
SCL: J3.4 R2-PINH.1 SENSOR2.4 U2.20 U3.16 U4.7
SDA: J3.3 R1_PINH.1 SENSOR2.3 U2.19 U3.15 U4.8
SRC: C4.2 D5.2 L1.1 Q3.3
SS_SD: D8.1 J4.P2 R10.1 U2.4
TX: TP1.TP U2.25
USB_D+: D1.1 U2.14
USB_D-: D1.3 U2.13
VBAT [POWER]: C2_BAT.1 MCP73831.3 Q1.3 TP3.TP U4.2 U4.3
VBUS [POWER]: C1_BAT.1 C4_USB.1 C5_USB.1 CHG_LED.A D1.5 D2.2 MCP73831.4 PFMF.050.1.2 Q1.1 R1_PWRUSB.2 TP14.TP
VRTC [POWER]: C8.1 C10_SUPERCAP.2 R_CAPACITOR.2 U3.14
VUSB [POWER]: J2.A4 J2.A9 J2.B4 J2.B9 PFMF.050.1.1

## Tracks (layer width: path | path; a pad name or v marks a point on that pad's centre or on a via)
3V3
  Top 0.3: U3.2 87.67,63.16 87.67,63.57 86.84,64.4 86.84,65.93 87.88,66.97 87.88,67.1 D7.2 87.88,66.76 92.52,62.12 R1_PINH1.2 92.66,61.98 93.9,61.98 96.4,59.49 96.4,55.68 95.43,54.71 | 95.43,54.71 92.66,54.71 R2-PINH1.2 | 117.45,42.31 117.45,42.8 IC4.5 | 117.45,42.31 120.56,39.2 C3.+ | C1_BAT2.1 123.4,40.86 122.3,40.86 120.7,39.27 C3.+ | J3.2 165.3,18.84 121.33,18.84 120.77,19.39 TP16.TP 120.63,19.53 120.63,39.06 C3.+ | 101.83,48.1 109.69,40.23 115.3,40.23 117.31,42.24 117.45,42.31 | 101.83,48.1 95.5,54.43 95.5,54.57 95.43,54.71 | R9.2 71.33,26.66 72.5,25.48 72.85,25.48 R_CL1.1 72.99,25.55 73.54,26.11 76,26.11 | 76,26.11 Q2.3 | U1.7 38.99,54.36 38.99,55.54 U1.8 38.85,55.61 37.4,55.61 36.91,56.09 33.24,56.09 32.51,55.37 | 32.51,55.37 31.99,54.85 31.99,53.81 31.3,53.12 U1.3 31.16,52.98 30.4,52.22 30.4,51.45 30.95,50.9 30.95,48.54 R5.2 31.02,48.41 31.72,47.71 31.72,46.6 43.7,34.62 45.57,34.62 R6.2 45.7,34.56 47.16,34.56 R8.2 47.3,34.62 48.75,34.62 R7.2 48.89,34.69 49.79,35.59 72.5,35.59 73.27,34.83 73.27,31.37 75.34,29.29 | 75.34,29.29 75.34,27 76,26.34 76,26.11 | 45.36,106.85 45.36,107 45.36,107.55 R_CHANGE.1 | IC1.2 45.84,102.14 45.57,102.14 45.15,102.56 45.15,103.46 45.36,103.67 45.36,106 44.51,106.85 | 45.36,106.85 52.84,106.85 53.46,107.48 60.39,107.48 R_RESET.1 | R1.1 18.97,39.75 12.67,39.75 8.86,43.56 8.86,43.9 U2.2 8.73,44.04 8.73,58.66 6.51,60.87 6.51,62.53 | 5.96,100 5.33,100 C9.1 | 5.96,100 7.13,101.17 R10.2 7.27,101.31 13.43,107.48 20.5,107.48 R_BOOT.1 20.64,107.41 21.19,106.85 44,106.85 44.51,106.85 | 5.54,90.44 4.92,90.44 J4.P4 | 5.54,90.44 6.09,91 6.09,99.93 5.96,100
  Top 0.3: 6.51,62.53 6.51,89.4 5.61,90.3 5.54,90.44 | 44.51,106.85 45.36,106.85 | 32.51,55.37 25.35,62.53 6.51,62.53 | 75.34,29.29 75.48,29.36 81.16,29.36 99.9,48.1 101.83,48.1
32KHZ  (via drill 0.3)
  Top 0.15: v89.61,53.39 92.59,53.39 R2-PINH1.1 | v88.85,60.11 88.85,63.02 88.92,63.09 U3.1 | v18.49,42.31 17.73,43.07 17.73,43.9 U2.9 | v57.41,29.92 v47.51,29.92
  Bottom 0.15: v89.61,53.39 88.92,53.39 86.7,55.61 86.7,56.3 | 86.7,56.3 86.7,57.96 v88.85,60.11 | v18.49,42.31 32.27,42.31 33.31,41.27 35.52,41.27 46.88,29.92 v47.51,29.92 | v57.41,29.92 83.79,56.3 86.7,56.3
DN
  Top 0.15: 162.04,53.88 162.39,53.53 J2.B7 | 162.04,53.88 162.04,54.15 162.39,54.5 164.47,54.5 J2.A7 | D1.4 155.54,49.38 157.47,49.38 161.98,53.88 162.04,53.88 | J2.B7
DP  (via drill 0.3)
  Top 0.15: D1.6 155.54,51.24 158.72,51.24 162.46,54.98 v162.53,54.98 164.45,54.98 J2.B6 | v162.53,54.02 164.48,54.02 J2.A6
  Bottom 0.15: v162.53,54.98 v162.53,54.02
EPD_3V3
  Top 0.3: 77.63,25.21 74.58,25.21 Q2.2 | 77.63,25.21 78.53,26.11 C7.1 | 76.97,14.3 77.08,14.4 81.09,14.4 81.3,14.61 81.3,15.03 J1.16 81.37,15.17 81.85,15.17 J1.15 81.92,15.3 81.92,15.65 82.13,15.86 82.82,15.86 88.22,21.26 88.5,21.26 EPD_C5.1 88.64,21.19 92.66,17.17 166.13,17.17 166.35,17.39 166.35,50.82 166.52,51 166.52,60.42 162.05,64.89 93.9,64.89 90.86,67.93 87.39,67.93 87.19,67.73 87.19,67.24 86.36,66.41 86.01,66.41 84.48,64.89 84.48,36.49 78.18,30.19 78.05,30.19 L1.2 | 76.97,14.3 66.29,3.62 58.72,3.62 TP17.TP | 76.97,14.3 76.87,14.4 76.87,24.45 77.63,25.21
EPD_3V3_C
  Top 0.3: Q2.1 74.51,27.01 74.31,26.8 72.92,26.8 R_CL1.2 72.85,26.94 72.85,31.16 71.67,32.34 71.67,33.79 TP13.TP 71.95,34.28 71.61,33.93 43.07,33.93 20.29,56.72 20.29,61.42 U2.18
EPD_BUSY  (via drill 0.3)
  Top 0.15: v83.79,13.43 84.83,14.47 84.83,15.1 J1.9 | v68.97,13.43 54.21,13.43 44.37,3.6 TP9.TP | v16,59.62 11.43,59.62 10.11,60.94 10.11,61.42 U2.26 | v33.59,42.03 v26.8,48.82
  Bottom 0.15: v83.79,13.43 77.49,13.43 77.42,13.37 69.04,13.37 v68.97,13.43 68.9,13.43 68.7,13.64 64.4,13.64 36.01,42.03 v33.59,42.03 | v26.8,48.82 v16,59.62
EPD_CS  (via drill 0.3)
  Top 0.15: v83.65,15.93 83.38,15.65 83.38,15.17 J1.12 | v72.3,20.08 72.3,22.58 71.33,23.55 D6.1 | R9.1 71.26,25.41 71.26,23.61 D6.1 | v22.64,41.27 20.29,43.63 20.29,43.9 U2.11 | v55.68,18.21 56.65,17.24 TP10.TP 56.72,17.24 63.09,23.61 71.19,23.61 D6.1
  Bottom 0.15: v83.65,15.93 83.45,15.93 81.23,18.14 74.24,18.14 v72.3,20.08 | v22.64,41.27 23.34,41.27 34.97,29.64 44.25,29.64 v55.68,18.21
EPD_DC  (via drill 0.3)
  Top 0.15: v82.06,12.95 83.79,14.68 83.79,15.1 J1.11 | v51.11,5.97 50.97,5.97 48.54,3.55 TP11.TP | v12.67,42.66 12.67,43.9 U2.5
  Bottom 0.15: v82.06,12.95 68.83,12.95 68.42,13.37 58.5,13.37 v51.11,5.97 51.18,5.97 52.84,4.31 52.84,3.96 52.49,3.62 51.72,3.62 v12.67,42.66
EPD_RST  (via drill 0.3)
  Top 0.15: v81.51,11.77 84.35,14.61 84.35,15.1 J1.10 | v73.61,11.77 66.7,4.86 54.98,4.86 53.67,3.55 TP12.TP 53.6,3.55 53.05,4.1 v52.35,4.1 | v16.48,55.26 16.48,61.42 U2.21 | v41.41,29.15 v16.48,54.08
  Bottom 0.15: v73.61,11.77 v81.51,11.77 | v16.48,54.08 v16.48,55.26 | v41.41,29.15 41.41,15.04 v52.35,4.1
FLASH_CS  (via drill 0.3)
  Top 0.15: 30.37,48.02 29.98,48.41 29.98,54.91 30.61,55.54 31.16,55.54 U1.1 | 30.37,48.02 30.95,47.44 30.95,47.3 R5.1 | v33.38,47.16 D9.1 | 30.37,48.02 v30.26,47.92 | v22.37,45.08 21.54,44.25 21.54,43.97 U2.12
  Bottom 0.15: v33.38,47.16 31.02,47.16 v30.26,47.92 30.26,48.13 29.78,48.61 29.5,48.61 25.55,44.67 24.65,44.67 24.24,45.08 v22.37,45.08
GDR  (via drill 0.3)
  Top 0.15: v87.19,13.57 88.29,14.68 88.29,15.1 J1.2 | R4.1 68.07,12.05 68.28,12.26 v68.28,12.88 68.21,12.88 68.07,13.02 66.06,13.02 65.37,12.33 65.09,12.33 Q3.1
  Bottom 0.15: v87.19,13.57 84.97,13.57 81.72,10.32 70.84,10.32 v68.28,12.88
GND  (via drill 0.3)
  Top 0.15: D11.2 48.68,38.02 47.09,38.02 D12.2 47.02,38.02 46.19,38.02 | 46.19,38.02 45.36,38.02 D10.2 45.29,38.09 43.07,38.09 32.55,48.61 D9.2 | 31.92,50.48 32.48,49.93 32.48,48.68 D9.2 | 31.92,50.48 31.23,51.18 31.23,51.73 U1.4 | 31.92,50.48 35.04,53.6 U1.9 | 7.72,60.21 12.05,55.88 12.05,52.56 U2.29_3 12.05,52.49 13.23,52.49 U2.29_6 13.3,52.49 14.47,52.49 U2.29_9 14.54,52.42 14.54,51.24 U2.29_8 14.54,51.18 14.54,50 U2.29_7 | 7.72,60.21 7.62,60.32 7.62,61.42 U2.28 | U2.29_5 13.23,51.18 12.12,51.18 U2.29_2 12.05,51.18 12.05,50 U2.29_1 12.12,50 13.23,50 U2.29_4 13.3,50 14.47,50 U2.29_7 | 24.72,45.15 24.72,42.73 21.12,39.13 12.12,39.13 7.62,43.63 7.62,43.9 U2.1 | 24.72,45.15 19.88,50 14.61,50 U2.29_7 | v31.72,49.1 32.41,49.1 D9.2 | v24.79,45.15 24.72,45.15 | J4.G1 15.51,85.32 15.51,86.42 16.27,87.19 16.27,90.09 15.44,90.92 J4.G2 15.44,91.06 14.61,91.89 14.61,98.47 11.98,101.11 11.98,101.31 D8.2 11.91,101.24 v8.03,101.24 | 3.88,92.66 4.85,92.66 J4.P6 | 3.88,92.66 2.22,94.32 2.22,95.43 J4.G4 2.22,95.5 2.22,97.99 5.26,101.04 5.26,101.17 C9.2 5.33,101.24 v6.09,101.24 6.09,101.31 12.88,108.1 21.81,108.1 22.23,107.68 BOOT_BUTTON.1 22.3,107.68 25.69,107.68 BOOT_BUTTON.2 25.76,107.61 25.83,107.55 27.49,107.55 C6.2 27.56,107.55 44.25,107.55 44.87,108.17 46.74,108.17 47.23,107.68 CHANGE_BUTTON.1 47.3,107.68 50.69,107.68 CHANGE_BUTTON.2 50.76,107.61 52.28,107.61 C10.2 52.35,107.61 53.05,107.61 53.53,108.1 60.94,108.1 61.77,107.27 RESET_BUTTON.1 | 3.88,92.66 3.88,92.59 1.25,89.96 1.25,82.34 J4.G3 1.25,82.27 v1.25,67.1 | TP5.TP 82.34,107.61 77.14,107.61 TP4.TP 77.08,107.61 67.38,107.61 C5.2 67.31,107.61 65.79,107.61 RESET_BUTTON.2 65.72,107.68 62.26,107.68 RESET_BUTTON.1
  Top 0.15: IC1.3 45.91,101.17 47.64,101.17 48.13,101.66 50.14,101.66 50.34,101.45 C_DELAY.2 55.44,106.45 60.97,106.45 RESET_BUTTON.1 | v7.83,60.32 7.72,60.21 | EPD_C1.2 68,16.27 69.25,16.27 69.32,16.34 EPD_C2.2 | D6.2 72.78,23.55 v72.78,21.95 72.78,19.8 69.39,16.41 EPD_C2.2 | v81.3,15.93 80.88,15.51 80.88,15.17 J1.17 | v84.9,15.93 85.32,15.51 85.32,15.17 J1.8 85.39,15.1 85.39,14.75 87.46,12.67 89.82,12.67 J1.MP1 | SJ1.1 64.82,8.73 64.96,8.86 64.96,10.46 R2.1 65.03,10.53 65.16,10.53 66,11.36 68.7,11.36 69.32,11.98 R4.2 69.39,12.05 69.67,12.33 v70.08,12.33 70.01,12.4 70.01,15.58 69.32,16.27 EPD_C2.2 | v75.76,12.33 76.04,12.6 76.31,12.6 J1.MP2 76.38,12.67 77.28,13.57 v77.28,13.85 | EPD_C11.2 79.5,22.64 78.05,22.64 EPD_C12.2 | EPD_C11.2 79.57,22.64 81.02,22.64 EPD_C10.2 81.09,22.64 82.55,22.64 EPD_C9.2 82.61,22.64 84,22.64 EPD_C8.2 84.07,22.64 84.83,22.64 | C7.2 79.92,26.11 79.92,22.71 EPD_C11.2 | 110.82,36.72 112.46,38.36 112.67,38.36 C1_BAT1.2 | 84.83,22.64 85.52,22.64 EPD_C7.2 85.59,22.64 86.98,22.64 EPD_C6.2 87.05,22.58 88.5,22.58 EPD_C5.2 98.11,32.15 106.24,32.15 110.82,36.72 | v84.9,20.08 84.9,20.84 84.83,20.91 84.83,22.64 | 159.21,10.6 159.9,10.6 C2.2 | 159.21,10.6 158.72,10.6 C1.2 | 157.96,13.5 157.54,13.09 157.54,12.81 SENSOR2.7 | 157.96,13.5 158.65,13.5 159.14,13.02 159.14,12.81 SENSOR2.5 | SENSOR2.1 156.78,15.65 156.78,14.75 157.96,13.57 157.96,13.5 | 159.21,10.6 159.21,12.74 SENSOR2.5 | v163.98,17.8 165.3,17.8 J3.1 | v159.69,13.5 159.21,13.02 SENSOR2.5 | C4_USB.2 155.4,45.91 155.4,47.44 C5_USB.2 155.33,47.51 v155.33,48.54 | D1.2 152.9,50.28 152.7,50.28 152.14,49.72 151.38,49.72 R2-USB.1 151.38,49.79 150.69,50.48 150.69,51.45
  Top 0.15: R2-USB1.1 155.6,51.94 154.91,51.94 153.25,50.28 153.04,50.28 D1.2 | v153.94,49.93 153.46,50.41 D1.2 | 164.77,50.76 164.79,50.93 | 164.78,57.82 164.79,57.63 | 150.69,51.45 156.5,57.27 164.74,57.27 164.79,57.33 | v166.89,50.62 168,50.62 | D3.1 84.62,34.28 84.62,36.08 85.11,36.56 85.11,50.34 C8.2 85.18,50.41 85.18,53.74 U3.13 85.18,53.81 85.18,54.15 87.32,56.3 v87.74,56.3 | R1_PWRUSB.1 109.76,41.48 110.8,41.48 111.15,41.83 114.61,41.83 IC4.2 114.68,41.9 114.82,41.9 118.52,45.6 | 118.52,45.6 120.56,43.56 120.56,42.17 C3.- 120.63,42.24 123.4,42.24 C1_BAT2.2 | 118.52,45.6 116.96,47.16 R2_BAT.2 116.96,47.44 116.96,47.85 v117.24,48.13 | U4.9 131.57,53.88 130.88,53.18 130.61,53.18 U4.4 130.54,53.12 130.12,53.12 127.91,50.9 121.81,50.9 120.08,52.63 119.87,52.63 MCP73831.2 119.8,52.63 118.69,52.63 118.35,52.28 v118.07,52.28 | U4.1 130.61,54.64 130.88,54.64 131.57,53.95 U4.9 | U4.9 131.64,53.88 131.78,53.74 132.47,53.74 U4.6 132.54,53.67 132.82,53.67 135.04,51.45 150.69,51.45 | v112.12,52.77 111.49,53.39 111.49,53.53 C2_BAT.2 | v127.97,55.68 127.21,56.44 127.21,56.58 C1_BAT.2 | v95.84,57.62 95.43,58.03 95.43,58.66 C10_SUPERCAP.1 | 110.82,36.72 110.8,36.74 v110.8,39.68 | v46.19,37.67 46.19,38.02 | 168,50.62 168,50.37 169,49.37 J2.MP1 | 168,50.62 168,58.19 169,59.19 J2.MP2 | 164.77,50.76 164.77,49.67 165.07,49.37 J2.MP3 | 164.79,57.63 164.79,57.33 | 164.78,57.82 164.78,58.9 165.07,59.19 J2.MP4 | 164.78,57.82 165.76,57.82 166.17,57.42 166.17,51.14 165.79,50.76 164.77,50.76 | J2.A1 164.79,50.93 | J2.A12 164.79,57.63 | J2.B1 164.79,57.33 | 164.79,50.93 J2.B12
  Bottom 0.15: v31.72,49.1 29.02,49.1 25.07,45.15 v24.79,45.15 | v6.09,101.24 v8.03,101.24 | v7.83,60.32 7.83,60.52 v1.25,67.1 | v70.08,12.33 v75.76,12.33 | v77.28,13.85 79.36,15.93 v81.3,15.93 83.03,15.93 83.52,15.44 84.42,15.44 v84.9,15.93 v84.9,20.08 | v159.69,13.5 v163.98,17.8 163.98,18.56 165.78,20.36 165.78,50.62 | v153.94,49.93 v155.33,48.54 155.4,48.54 157.47,50.62 165.78,50.62 | 165.78,50.62 v166.89,50.62 | 117.24,52.28 v118.07,52.28 118.07,52.22 118.62,51.66 118.97,51.66 122.99,55.68 v127.97,55.68 | 117.24,52.28 112.6,52.28 v112.12,52.77 111.63,52.77 106.78,57.62 v95.84,57.62 95.77,57.62 94.46,56.3 v87.74,56.3 | 117.24,52.28 v117.24,48.13 117.24,47.09 110.8,40.65 v110.8,39.68 | v46.19,37.67 46.19,36.84 49.17,33.86 49.17,29.71 56.92,21.95 v72.78,21.95
  pour Top: 6.16,43.56 6.14,43.54 6.12,43.52 0.08,43.52 0.08,0.08 73.92,0.08 73.92,10.02 73.94,10.04 73.96,10.06 73.98,10.08 92.22,10.08 92.24,10.06 92.26,10.04 92.28,10.02 92.28,0.08 170.12,0.08 170.12,67.12 92.18,67.12 92.16,67.14 92.14,67.16 92.12,67.18 92.12,111.12 68.48,111.12 68.48,109.88 68.46,109.86 68.44,109.84 68.42,109.82 19.68,109.82 19.66,109.84 19.64,109.86 19.62,109.88 19.62,111.12 0.08,111.12 0.08,61.88 6.12,61.88 6.14,61.86 6.16,61.84 6.18,61.82 6.18,43.58
  pour Bottom: 6.16,43.56 6.14,43.54 6.12,43.52 0.08,43.52 0.08,0.08 73.92,0.08 73.92,10.02 73.94,10.04 73.96,10.06 73.98,10.08 92.22,10.08 92.24,10.06 92.26,10.04 92.28,10.02 92.28,0.08 170.12,0.08 170.12,67.12 92.18,67.12 92.16,67.14 92.14,67.16 92.12,67.18 92.12,111.12 68.48,111.12 68.48,109.88 68.46,109.86 68.44,109.84 68.42,109.82 19.68,109.82 19.66,109.84 19.64,109.86 19.62,109.88 19.62,111.12 0.08,111.12 0.08,61.88 6.12,61.88 6.14,61.86 6.16,61.84 6.18,61.82 6.18,43.58
  pour Top: 6.16,43.56 6.14,43.54 6.12,43.52 0.08,43.52 0.08,0.08 73.92,0.08 73.92,10.02 73.94,10.04 73.96,10.06 73.98,10.08 92.22,10.08 92.24,10.06 92.26,10.04 92.28,10.02 92.28,0.08 170.12,0.08 170.12,67.12 92.18,67.12 92.16,67.14 92.14,67.16 92.12,67.18 92.12,111.12 68.48,111.12 68.48,109.88 68.46,109.86 68.44,109.84 68.42,109.82 19.68,109.82 19.66,109.84 19.64,109.86 19.62,109.88 19.62,111.12 0.08,111.12 0.08,61.88 6.12,61.88 6.14,61.86 6.16,61.84 6.18,61.82 6.18,43.58
  pour Bottom: 6.16,43.56 6.14,43.54 6.12,43.52 0.08,43.52 0.08,0.08 73.92,0.08 73.92,10.02 73.94,10.04 73.96,10.06 73.98,10.08 92.22,10.08 92.24,10.06 92.26,10.04 92.28,10.02 92.28,0.08 170.12,0.08 170.12,67.12 92.18,67.12 92.16,67.14 92.14,67.16 92.12,67.18 92.12,111.12 68.48,111.12 68.48,109.88 68.46,109.86 68.44,109.84 68.42,109.82 19.68,109.82 19.66,109.84 19.64,109.86 19.62,109.88 19.62,111.12 0.08,111.12 0.08,61.88 6.12,61.88 6.14,61.86 6.16,61.84 6.18,61.82 6.18,43.58
GPIO8
  Top 0.15: R1.2 18.97,41.06 18.97,43.9 U2.10
I2C_PW  (via drill 0.3)
  Top 0.15: C2.1 159.9,9.28 158.72,9.28 C1.1 158.65,9.35 157.41,10.6 R1_PINH.2 157.34,10.6 156.71,10.6 | 156.71,10.6 156.02,10.6 R2-PINH.2 | 156.71,10.6 156.71,12.05 | 156.71,12.05 156.71,12.74 SENSOR2.8 156.71,12.81 156.23,13.3 156.23,16.27 | 156.71,12.05 157.82,12.05 158.31,12.53 158.31,12.74 SENSOR2.6 | 156.23,16.27 156.44,16.48 156.99,16.48 157.47,16 157.47,15.72 SENSOR2.2 | v29.64,48.13 21.54,56.23 21.54,61.42 U2.17 | v88.5,20.57 88.71,20.57 93,16.27 156.23,16.27
  Bottom 0.15: v29.64,48.13 29.64,47.92 35.25,42.31 36.15,42.31 57.89,20.57 v88.5,20.57
INT_RTC  (via drill 0.3)
  Top 0.15: v89.47,60.73 92.59,60.73 R1_PINH1.1 | U3.3 86.42,63.09 86.42,62.74 v87.46,61.7 87.46,61.63 87.19,61.35 v87.19,60.11 | v20.5,48.27 16.48,44.25 16.48,43.97 U2.8 | v95.91,60.73 102.63,60.73 TP15.TP
  Bottom 0.15: v87.46,61.7 88.29,61.7 89.26,60.73 v89.47,60.73 v95.91,60.73 | v20.5,48.27 26.87,48.27 30.61,52.01 30.61,53.81 32.96,56.16 83.24,56.16 v87.19,60.11
IO/BOOT  (via drill 0.3)
  Top 0.15: R_BOOT.2 20.57,108.86 21.95,108.86 22.23,109.14 BOOT_BUTTON.4 22.3,109.14 23.61,109.14 24.58,108.17 v24.65,108.17 25.69,109.21 BOOT_BUTTON.3 25.76,109.14 26.04,108.86 27.49,108.86 C6.1 | v24.93,61.98 24.45,61.49 24.1,61.49 U2.15 | v24.93,106.3 v24.93,79.43
  Bottom 0.15: v24.93,79.43 v24.93,61.98 | v24.93,106.3 24.93,107.89 v24.65,108.17
IO/CHANGE  (via drill 0.3)
  Top 0.15: C10.1 52.28,108.93 50.97,108.93 50.76,109.14 CHANGE_BUTTON.3 50.69,109.21 47.3,109.21 CHANGE_BUTTON.4 47.23,109.14 47.02,108.93 45.43,108.93 R_CHANGE.2 45.36,108.86 44.94,108.44 v44.53,108.44 | v13.92,60.32 13.92,61.42 U2.23
  Bottom 0.15: v13.92,60.32 13.92,77.84 v44.53,108.44
MISO  (via drill 0.3)
  Top 0.15: 47.16,32.55 47.16,32.06 46.54,31.44 46.54,23.34 47.09,22.78 TP6.TP | 47.16,32.55 47.16,33.24 R8.1 | v47.09,35.32 47.09,36.49 D12.1 | v47.09,32.55 47.16,32.55 | v30.47,54.78 30.89,54.36 31.16,54.36 U1.2 31.09,54.29 v31.09,53.67 | v21.47,54.78 15.23,54.78 9.66,60.35 | 9.66,60.35 8.86,61.15 8.86,61.42 U2.27 | v3.88,93.28 4.29,93.69 4.99,93.69 J4.P7 | v9.63,60.32 9.66,60.35
  Bottom 0.15: v47.09,32.55 v47.09,35.32 47.09,35.52 31.09,51.52 v31.09,53.67 | v21.47,54.78 v30.47,54.78 | v3.88,93.28 3.88,92.1 9.63,86.36 v9.63,60.32
MOSI  (via drill 0.3)
  Top 0.15: J1.14 82.34,15.1 82.34,14.75 77.91,10.32 73.54,10.32 65.32,2.09 38.5,2.09 37.46,2.09 36.08,3.48 TP7.TP | v49.65,33.31 48.82,33.31 R7.1 48.75,33.24 47.02,31.51 v47.02,30.4 | v49.1,35.66 49.1,36.15 48.75,36.49 D11.1 48.89,36.42 49.72,37.26 49.72,43.28 39.54,53.46 | 39.54,53.46 38.43,53.46 38.3,53.32 38.3,52.77 38.99,52.08 38.99,51.8 U1.5 | v16.07,42.8 15.23,43.63 15.23,43.9 U2.7 | v3.81,88.57 4.5,89.26 4.99,89.26 J4.P3 | v9.14,82.75 12.81,82.75 39.68,55.88 39.68,53.67 39.54,53.53 39.54,53.46 | 38.99,3 38.99,26.11 v45.15,32.27
  Top 0.152: 38.99,3 38.99,2.58 38.5,2.09
  Bottom 0.15: v49.65,33.31 49.65,35.11 v49.1,35.66 | v16.07,42.8 32.2,42.8 33.45,41.55 35.87,41.55 v45.15,32.27 v47.02,30.4 | v3.81,88.57 3.81,88.09 v9.14,82.75
N$1  (via drill 0.3)
  Top 0.15: v162.04,53.25 162.74,53.25 162.94,53.05 164.48,53.05 J2.A5 | v160.11,53.25 158.57,53.25 157.02,54.8 R2-USB1.2
  Bottom 0.15: v162.04,53.25 v160.11,53.25
N$2
  Top 0.15: J2.B5 164.49,56.02 155.72,56.02 152.17,52.47 152.17,51.79 R2-USB.2
N$4  (via drill 0.3)
  Top 0.15: v77.42,19.11 77.42,15.17 J1.24 | v78.05,19.74 78.05,21.4 EPD_C12.1
  Bottom 0.15: v78.05,19.74 v77.42,19.11
N$5  (via drill 0.3)
  Top 0.15: v111.42,39.68 111.42,38.43 C1_BAT1.1 | D2.1 111.49,40.93 111.63,40.79 v112.25,40.79 112.32,40.79 112.46,40.93 114.61,40.93 IC4.3 | v113.71,42.31 114.19,42.8 114.61,42.8 IC4.1 | v127,49.72 127.21,49.51 128.11,49.51 Q1.2
  Bottom 0.15: v111.42,39.68 111.42,39.96 v112.25,40.79 112.25,40.86 v113.71,42.31 113.78,42.31 121.19,49.72 v127,49.72
N$6
  Top 0.15: CHG_LED.C 114.75,53.53 114.75,52.28 R1_BAT.2
N$7  (via drill 0.3)
  Top 0.15: C4.1 89.75,34.76 88.57,34.76 88.09,34.28 D3.2 88.02,34.28 87.74,34.56 v87.12,34.56 | v78.88,37.05 76.38,37.05 D4.1
  Bottom 0.15: v78.88,37.05 84.62,37.05 v87.12,34.56
N$8  (via drill 0.3)
  Top 0.15: v112.74,52.77 113.22,52.28 113.43,52.28 R1_BAT.1 | v118.83,52.15 119.39,52.15 119.8,51.73 MCP73831.1
  Bottom 0.15: v112.74,52.77 118.21,52.77 v118.83,52.15
N$9  (via drill 0.3)
  Top 0.15: v116.27,46.74 116.89,46.12 R2_BAT.1 | v116.27,50.76 117.17,51.66 MCP73831.5
  Bottom 0.15: v116.27,50.76 v116.27,46.74
N$10  (via drill 0.3)
  Top 0.15: v86.91,18.35 86.91,15.17 J1.5 | v71.61,21.05 67.24,16.69 67.24,15.86 67.59,15.51 68.9,15.51 69.32,15.1 EPD_C2.1
  Bottom 0.15: v86.91,18.35 88.99,20.43 88.99,20.71 88.64,21.05 v71.61,21.05
N$11
  Top 0.15: J1.22 78.39,15.17 78.39,16.41 82.75,20.77 83.1,20.77 83.24,20.91 83.24,21.74 83.1,21.88 81.65,21.88 81.09,21.33 EPD_C10.1
N$12  (via drill 0.3)
  Top 0.15: v87.39,18 87.39,15.17 J1.4 | v70.98,21.05 70.98,20.84 66.97,16.83 66.97,15.72 67.66,15.03 67.93,15.03 EPD_C1.1
  Bottom 0.15: v87.39,18 87.39,18.42 89.26,20.29 89.26,20.84 88.64,21.47 71.81,21.47 71.74,21.54 71.47,21.54 v70.98,21.05
N$13
  Top 0.15: J1.20 79.36,15.17 79.36,16.62 84,21.26 EPD_C8.1
N$14
  Top 0.15: J1.19 79.92,15.17 79.92,15.58 83.93,19.6 85.04,19.6 85.52,20.08 85.52,21.26 EPD_C7.1
N$15
  Top 0.15: J1.18 80.4,15.17 80.4,15.65 84.07,19.32 85.18,19.32 86.98,21.12 86.98,21.26 EPD_C6.1
N$16
  Top 0.15: IC1.5 48.75,102.97 50.14,102.97 50.34,102.77 C_DELAY.1
N$17  (via drill 0.3)
  Top 0.15: v85.45,65.09 85.73,65.37 86.15,65.37 R_CAPACITOR.1 | v85.18,66.41 85.87,67.1 D7.1
  Bottom 0.15: v85.45,65.09 85.45,66.13 v85.18,66.41
PREVGH  (via drill 0.3)
  Top 0.15: v78.88,16.27 78.88,15.17 J1.21 | 79.19,17.97 82.55,21.33 EPD_C9.1 | 79.19,17.97 v78.88,17.66 | 79.19,17.97 77.35,19.8 77.35,23.13 79.15,24.93 79.15,26.52 83.24,30.61 84.55,30.61 D5.1
  Bottom 0.15: v78.88,17.66 v78.88,16.27
PREVGL  (via drill 0.3)
  Top 0.15: v77.91,18.63 77.91,15.17 J1.23 | v79.36,20.08 79.36,21.19 79.5,21.33 EPD_C11.1 79.57,21.33 v80.26,22.02 | v79.84,35.59 79.84,37.05 D4.2
  Bottom 0.15: v79.36,20.08 v77.91,18.63 | v79.84,35.59 79.84,22.44 v80.26,22.02
RESE  (via drill 0.3)
  Top 0.15: v86.42,14.34 87.46,14.34 87.81,14.68 87.81,15.1 J1.3 | v71.4,11.29 68.14,8.03 R3.1 68,7.96 67.66,7.62 64.13,7.62 63.99,7.76 63.99,10.66 64.54,11.22 65.16,11.22 66.2,12.26 66.34,12.26 Q3.2
  Bottom 0.15: v86.42,14.34 85.32,14.34 82.27,11.29 v71.4,11.29
RESE'
  Top 0.15: R2.2 66.27,10.46 66.27,8.73 SJ1.2 66.34,9.28 R3.2
RESET  (via drill 0.3)
  Top 0.15: C5.1 66.06,108.86 65.79,109.14 RESET_BUTTON.3 65.72,109.21 62.26,109.21 RESET_BUTTON.4 62.19,109.14 60.73,109.14 60.45,108.86 R_RESET.2 60.39,108.79 v53.6,108.79 | v47.85,103.04 45.91,103.04 IC1.1 | v14.4,49.17 10.11,44.87 10.11,43.97 U2.3
  Bottom 0.15: v53.6,108.79 v47.85,103.04 47.85,102.97 14.4,69.53 v14.4,49.17
RTC_RST  (via drill 0.3)
  Top 0.15: v26.66,60.45 23.55,60.45 22.85,61.15 22.85,61.42 U2.16 | v85.04,64.54 85.04,63.23 85.11,63.16 U3.4
  Bottom 0.15: v26.66,60.45 80.95,60.45 v85.04,64.54
RX  (via drill 0.3)
  Top 0.15: v12.67,60.32 12.67,61.42 U2.24 | v12.67,68.21 12.67,69.04 13.09,69.46 TP2.TP
  Bottom 0.15: v12.67,68.21 v12.67,60.32
SCK  (via drill 0.3)
  Top 0.15: v79.01,10.8 82.82,14.61 82.82,15.1 J1.13 | v72.02,10.8 67.67,6.46 48.96,6.46 44.87,2.37 41.41,2.37 | 41.41,2.37 40.3,3.48 TP8.TP | 45.64,32.69 45.64,6.59 41.41,2.37 | 45.64,32.69 45.64,33.24 R6.1 | 39.99,51.76 49.44,42.31 49.44,37.46 49.24,37.26 46.4,37.26 45.7,36.56 45.36,36.56 D10.1 45.7,36.49 46.47,35.73 v46.47,35.52 | 39.99,51.76 39.06,52.7 39.06,52.98 U1.6 | v17.45,47.78 13.92,44.25 13.92,43.97 U2.6 | v33.38,48.61 36.84,48.61 39.99,51.76 | v3.32,90.3 4.5,91.48 4.99,91.48 J4.P5 | v46.47,32.69 45.64,32.69
  Bottom 0.15: v72.02,10.8 v79.01,10.8 | v33.38,48.61 32.41,49.58 29.09,49.58 27.29,47.78 v17.45,47.78 14.54,47.78 13.92,48.41 13.92,54.85 3.32,65.44 v3.32,90.3 | v46.47,35.52 v46.47,32.69
SCL  (via drill 0.3)
  Top 0.15: R2-PINH.1 156.02,9.28 156.23,9.28 157.06,8.45 160.59,8.45 160.87,8.73 160.87,13.92 159.14,15.65 SENSOR2.4 159.21,15.65 v160.18,16.62 | v135.18,51.94 132.96,54.15 132.54,54.15 U4.7 | v165.3,21.81 165.3,20.84 J3.4 | v19.74,59.35 19.53,59.14 18.91,59.14 17.73,60.32 17.73,61.42 U2.20 | v88.78,55.19 88.78,53.95 88.92,53.81 U3.16
  Bottom 0.15: v160.18,16.62 165.3,21.74 v165.3,21.81 v135.18,51.94 135.18,52.63 128.87,58.93 89.33,58.93 | v19.74,59.35 85.8,59.35 87.05,60.59 88.99,60.59 89.33,60.25 89.33,58.93 | 89.33,58.93 86.98,56.58 86.98,55.75 88.02,54.71 88.29,54.71 v88.78,55.19
SDA  (via drill 0.3)
  Top 0.15: 159.31,14.51 158.38,15.44 158.38,15.65 SENSOR2.3 | 159.31,14.51 160.59,13.23 160.59,8.86 160.45,8.73 158.1,8.73 157.54,9.28 157.41,9.28 R1_PINH.1 | v164.19,19.39 164.54,19.74 165.3,19.74 J3.3 | v159.34,14.54 159.31,14.51 | v131.02,56.16 132.47,54.71 U4.8 | v88.16,55.19 88.16,54.22 87.74,53.81 U3.15 | v19.04,59.62 19.04,61.42 U2.19 | v83.93,55.82 v83.1,56.65
  Bottom 0.15: v159.34,14.54 160.49,15.69 | 160.49,15.69 v164.19,19.39 | v19.04,59.62 19.04,59.42 21.81,56.65 v83.1,56.65 | v83.93,55.82 86.08,55.82 88.99,52.91 89.75,52.91 90.09,53.25 90.09,54.5 88.92,55.68 88.57,55.68 88.16,55.26 v88.16,55.19 87.25,56.09 87.25,56.44 88.92,58.1 106.71,58.1 108.65,56.16 v131.02,56.16 131.02,45.15 160.49,15.69
SRC  (via drill 0.3)
  Top 0.15: C4.2 89.75,33.52 89.75,32.34 88.09,30.68 D5.2 88.02,30.68 v85.52,30.68 | v65.79,22.44 65.79,14.4 Q3.3 | v77.6,33.55 77.82,33.77 L1.1
  Bottom 0.15: v65.79,22.44 66.49,22.44 v77.6,33.55 77.6,34.18 79.5,36.08 79.98,36.08 85.39,30.68 v85.52,30.68
SS_SD  (via drill 0.3)
  Top 0.15: 8.66,99.93 11.91,99.93 D8.1 | 8.66,99.93 7.2,99.93 R10.1 | v14.4,48.54 11.43,45.57 11.43,43.97 U2.4 | v14.89,69.39 14.89,76.38 8.66,82.61 8.66,88.22 | 8.66,99.93 8.66,88.22 | v4.29,88.22 5.4,88.22 J4.P2 | 8.66,88.22 v7.13,88.22
  Bottom 0.15: v14.4,48.54 14.89,49.03 v14.89,69.39 | v7.13,88.22 v4.29,88.22
TX  (via drill 0.3)
  Top 0.15: v11.36,60.32 11.36,61.42 U2.25 | v11.36,68.28 11.36,68.83 10.73,69.46 TP1.TP
  Bottom 0.15: v11.36,68.28 v11.36,60.32
USB_D+  (via drill 0.3)
  Top 0.15: v152.7,51.94 152.9,51.73 152.9,51.24 D1.1 | v20.36,48.89 20.5,48.89 24.03,45.36 24.03,43.97 U2.14
  Bottom 0.15: v152.7,51.94 136.28,51.94 126.03,62.19 83.1,62.19 80.88,59.97 19.32,59.97 19.18,60.11 15.86,60.11 15.51,59.76 15.51,53.74 v20.36,48.89
USB_D-  (via drill 0.3)
  Top 0.15: v128.87,49.24 129.01,49.1 151.87,49.1 152.07,49.31 152.9,49.31 D1.3 | v47.02,29.43 v50.07,29.43 | v23.2,41.83 23.2,43.56 22.85,43.9 U2.13
  Bottom 0.15: v128.87,49.24 121.6,49.24 109.9,37.53 65.65,37.53 57.55,29.43 v50.07,29.43 | v47.02,29.43 44.87,29.43 33.31,41 24.03,41 v23.2,41.83
VBAT
  Top 0.3: C2_BAT.1 110.18,53.53 112.25,51.45 115.65,51.45 117.24,53.05 118.9,53.05 119.46,53.6 119.8,53.6 MCP73831.3 119.94,53.53 125.2,53.53 127.07,51.66 Q1.3 127.21,51.59 128.04,51.59 130.12,53.67 130.4,53.67 U4.3 130.54,53.74 130.54,54.15 U4.2 130.4,54.22 130.12,54.22 129.84,54.5 129.84,54.91 130.47,55.54 130.47,63.57 TP3.TP
VBUS
  Top 0.3: 154.15,48.68 154.15,47.58 C5_USB.1 154.08,47.44 154.08,45.91 C4_USB.1 154.15,45.77 154.15,43.77 154.84,43.07 PFMF.050.1.2 154.98,42.94 160.38,42.94 TP14.TP | 154.15,48.68 154.15,49.31 155.12,50.28 D1.5 | C1_BAT.1 127.14,55.33 118.9,55.33 117.31,53.74 MCP73831.4 117.17,53.67 116.55,54.29 114.19,54.29 113.5,53.6 113.22,53.6 CHG_LED.A 113.08,53.67 112.53,53.67 111.91,54.29 109.69,54.29 109.48,54.08 109.48,52.98 114.73,47.73 114.73,46.38 | R1_PWRUSB.2 109.76,42.73 111.15,42.73 111.42,43 D2.2 111.49,43.14 114.67,46.33 114.73,46.38 | 114.73,46.38 115.41,47.05 117.79,49.44 126.17,49.44 Q1.1 126.31,49.38 127,48.68 154.15,48.68
VRTC
  Top 0.3: C8.1 86.42,50.41 86.42,53.74 U3.14 86.42,53.95 86.42,54.22 88.29,56.09 88.29,56.51 | 88.29,56.51 88.29,64.19 87.53,64.96 87.53,65.37 R_CAPACITOR.2 | 88.29,56.51 95.36,56.51 C10_SUPERCAP.2
VUSB
  Top 0.3: PFMF.050.1.1 150.48,42.94 152.56,40.86 160.18,40.86 161.7,42.38 161.7,50.55 162.81,51.66 164.73,51.66 164.79,51.73 | 164.79,56.53 164.87,56.46 165.19,56.46 165.35,56.3 165.35,52.27 165.19,52.1 164.87,52.1 164.79,52.03 | 164.79,52.03 164.79,51.73 | J2.A4 164.79,51.73 | J2.B4 164.79,56.53 | J2.B9 164.79,52.03 | 164.79,56.53 J2.A9

## Text on the board
tNames: GND | GND | TX | RX | VBAT | INT_RTC | VBUS | EPD_3V3_C | L1 | MISO | 3V3 | EPD_CS | MOSI | SCK | EPD_BUSY | EPD_DC | EPD_RST | EPD_3V3